# EAGLE board RSeries Lifter v16 (EAGLE 6.4)
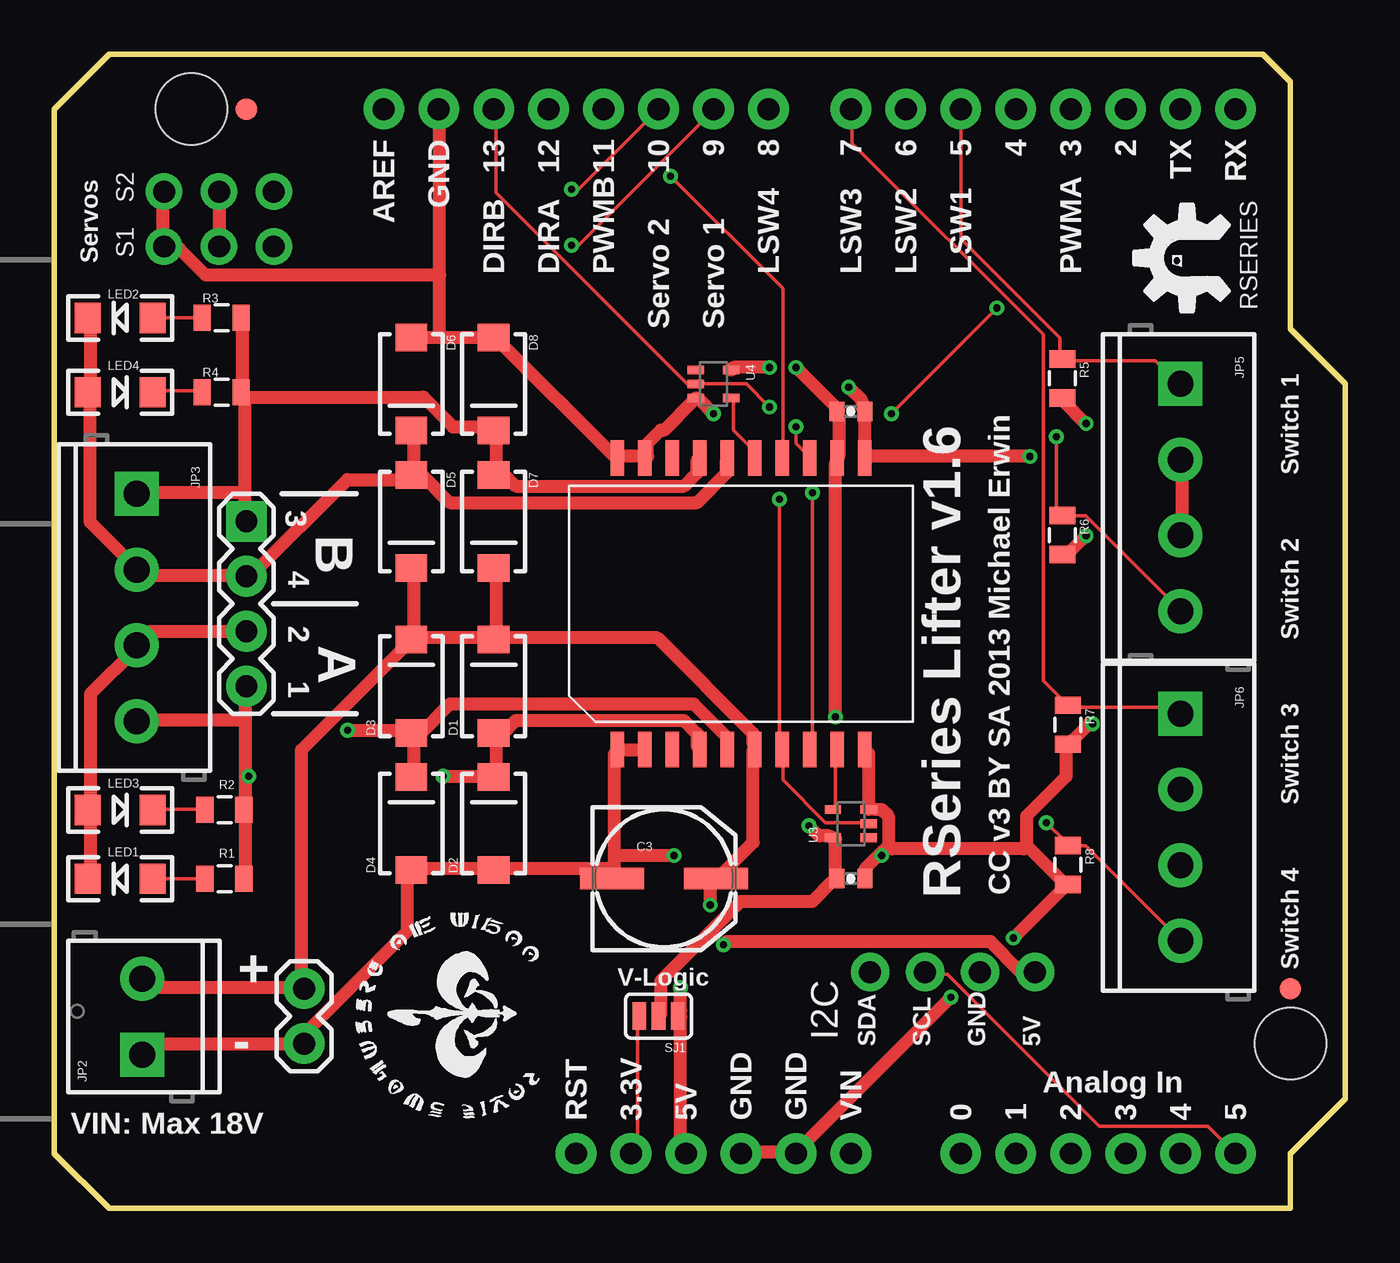
[diagram p0: board, top side]
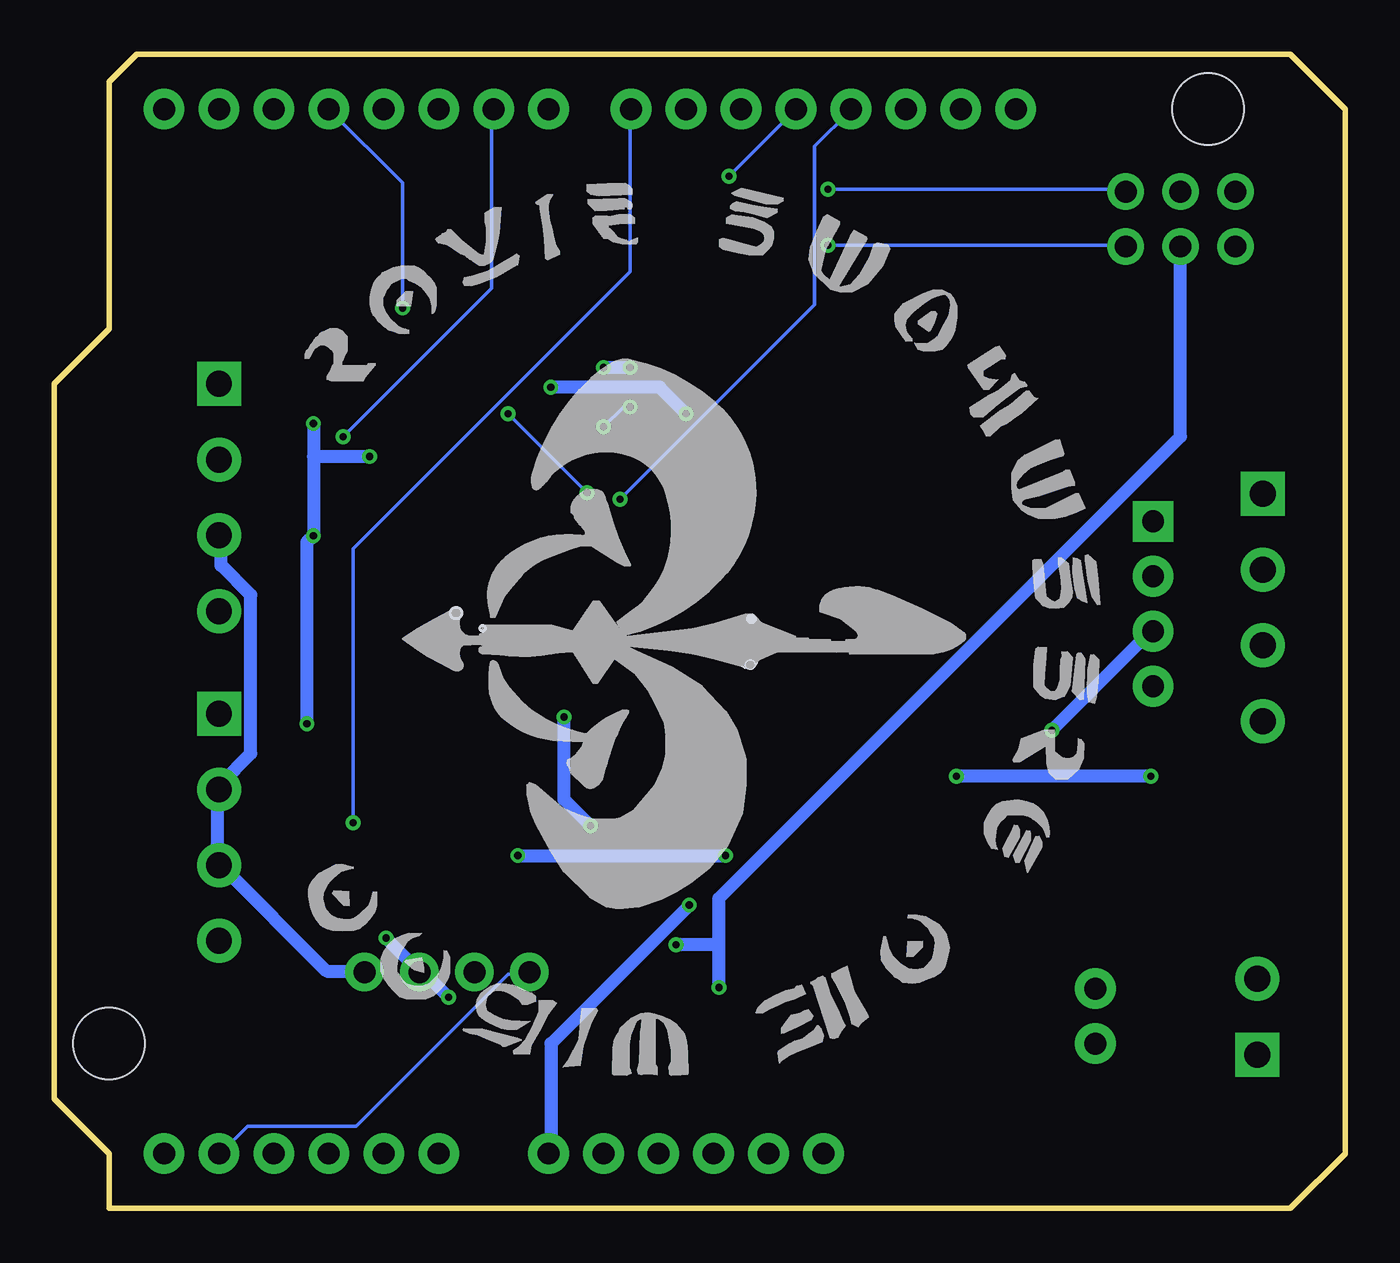
[diagram p1: board, bottom side, seen from below]

Size 59.69 x 53.34 mm. Coordinates in mm from the lower left corner, seen from the top.
Outline: 0,50.8 0,2.54 2.54,0 57.15,0 57.15,2.54 59.69,5.08 59.69,38.1 57.15,40.64 57.15,52.07 55.88,53.34 2.54,53.34 0,50.8
Copper layers (1*16): Top 0.0356mm / dielectric 1.5011mm / Bottom 0.0356mm
Design rules "LaenPCBOrder *": minimum track width 6mil, minimum drill 13mil, track to track 6mil, track to pad 6mil, pad to pad 6mil, via to via 6mil, smd to smd 6mil, copper to edge 15mil, drill to drill 6mil, minimum pad ring 7mil, minimum via ring 7mil, stop-mask expansion 4mil, vias tented up to drill 0mil, thermal gap 10mil
Net classes: 1 power: width 0.61 mm

## Footprints (pad centres in the part's own frame; a part is rotated, then mirrored left to right if it is on the bottom)
0402-CAP = smd 0.7 x 0.9: 1 -0.65,0; 2 0.65,0
NIPPON_F80 = smd 2.95 x 1: + 2.4,0; - -2.4,0
SMA-DIODE = smd 1.27 x 1.47: A -2.15,0; C 2.15,0
1X04-CLEANBIG = drill 1.016 pad 1.778: 1 -3.81,0; 2 -1.27,0; 3 1.27,0; 4 3.81,0
1X02 = drill 1.016 pad 1.88: 1 0,0; 2 2.54,0
SCREWTERMINAL-3.5MM-2 = drill 1.2 pad 2.032 square: 1 0,0 | drill 1.2 pad 2.032: 2 3.5,0
SCREWTERMINAL-3.5MM-4 = drill 1.2 pad 2.032 square: 1 0,0 | drill 1.2 pad 2.032: 2 3.5,0; 3 7,0; 4 10.5,0
1X04 = drill 1.016 pad 1.88 square: 1 0,0 | drill 1.016 pad 1.88: 2 2.54,0; 3 5.08,0; 4 7.62,0
1X03-CLEANBIG = drill 1.016 pad 1.676: 1 -2.54,0; 2 0,0; 3 2.54,0
LED-1206 = smd 1.2 x 1.4: A -1.5,0; C 1.5,0
0805 = smd 0.8 x 1.2: 1 -0.9,0; 2 0.9,0
SJ_3_PASTE1&2 = smd 0.635 x 1.27: 1 -0.889,0; 2 0,0; 3 0.889,0
DUEMILANOVE_SHIELD_NOLABELS = drill 1.016 pad 1.88: 3.3V 50.8,26.67; 5V 50.8,29.21; A0 50.8,41.91; A1 50.8,44.45; A2 50.8,46.99; A3 50.8,49.53; A4 50.8,52.07; A5 50.8,54.61; AREF 2.54,15.24; D2 2.54,49.53; D3 2.54,46.99; D4 2.54,44.45; D5 2.54,41.91; D6 2.54,39.37; D7 2.54,36.83; D8 2.54,33.02; D9 2.54,30.48; D10 2.54,27.94; D11 2.54,25.4; D12 2.54,22.86; D13 2.54,20.32; GND@0 50.8,31.75; GND@1 50.8,34.29; GND@2 2.54,17.78; RES 50.8,24.13; RX 2.54,54.61; TX 2.54,52.07; VIN 50.8,36.83 | hole 3.302: 45.72,57.15; 2.54,6.35
POWERSO20 = smd 1.651 x 0.635: P$1 -6.731,5.715; P$2 -6.731,4.445; P$3 -6.731,3.175; P$4 -6.731,1.905; P$5 -6.731,0.635; P$6 -6.731,-0.635; P$7 -6.731,-1.905; P$8 -6.731,-3.175; P$9 -6.731,-4.445; P$10 -6.731,-5.715; P$11 6.731,-5.715; P$12 6.731,-4.445; P$13 6.731,-3.175; P$14 6.731,-1.905; P$15 6.731,-0.635; P$16 6.731,0.635; P$17 6.731,1.905; P$18 6.731,3.175; P$19 6.731,4.445; P$20 6.731,5.715
SC70 = smd 0.4 x 0.75: 1 -0.65,-0.825; 2 0,-0.825; 3 0.65,-0.825; 4 0.65,0.825; 5 -0.65,0.825
FIDUCIAL-1X2 = smd 1 x 1: 1 0,0

## Placement (x,y rotation side)
C1  0.1uF  [0402-CAP]  36.83,15.24 0 top
C3  100uF,25V  [NIPPON_F80]  28.19,15.24 0 top
C8  0.1uF  [0402-CAP]  36.83,36.83 0 top
D1  MBRA140  [SMA-DIODE]  20.32,24.13 90 top
D2  MBRA140  [SMA-DIODE]  20.32,17.78 90 top
D3  MBRA140  [SMA-DIODE]  16.51,24.13 90 top
D4  MBRA140  [SMA-DIODE]  16.51,17.78 90 top
D5  MBRA140  [SMA-DIODE]  16.51,31.75 270 top
D6  MBRA140  [SMA-DIODE]  16.51,38.1 270 top
D7  MBRA140  [SMA-DIODE]  20.32,31.75 270 top
D8  MBRA140  [SMA-DIODE]  20.32,38.1 270 top
I2C  [1X04-CLEANBIG]  41.53,10.92 0 top
JP1  [1X02]  11.56,7.62 90 top
JP2  [SCREWTERMINAL-3.5MM-2]  4.06,7.11 90 top
JP3  [SCREWTERMINAL-3.5MM-4]  3.81,33.02 270 top
JP4  [1X04]  8.89,31.75 270 top
JP5  [SCREWTERMINAL-3.5MM-4]  52.07,38.1 270 top
JP6  [SCREWTERMINAL-3.5MM-4]  52.07,22.86 270 top
JP7  [1X03-CLEANBIG]  7.62,44.45 180 top
JP8  [1X03-CLEANBIG]  7.62,46.99 180 top
LED1  Yellow  [LED-1206]  3.05,15.24 180 top
LED2  Yellow  [LED-1206]  3.05,41.15 180 top
LED3  Blue  [LED-1206]  3.05,18.41 0 top
LED4  Blue  [LED-1206]  3.05,37.72 0 top
R1  1K  [0805]  7.87,15.24 0 top
R2  1K  [0805]  7.87,18.41 0 top
R3  1K  [0805]  7.75,41.15 0 top
R4  1K  [0805]  7.75,37.72 0 top
R5  10k  [0805]  46.61,38.35 270 top
R6  10k  [0805]  46.61,31.11 270 top
R7  10k  [0805]  46.86,22.35 270 top
R8  10k  [0805]  46.86,15.88 270 top
SJ1  [SJ_3_PASTE1&2]  27.94,8.89 180 top
U1  ARDUINO  [DUEMILANOVE_SHIELD_NOLABELS]  0,53.34 270 top
U2  L298  [POWERSO20]  31.75,27.94 90 top
U3  74HC1G04  [SC70]  36.83,17.78 90 top
U4  74HC1G04  [SC70]  30.48,38.1 270 top
U$3  FIDUCIAL1X2  [FIDUCIAL-1X2]  57.15,10.16 0 top
U$4  FIDUCIAL1X2  [FIDUCIAL-1X2]  8.89,50.8 0 top
U$6  [ROYAL-ENGINEERS-OF-NABOO-SMALL]  22.73,4.06 90 top
U$7  RSERIES-OSHW-LOGOMEDIUM  [RSERIES-OSHW-LOGO-MEDIUM]  52.32,43.81 90 top
U$10  [ROYAL-ENGINEERS-OF-NABOO-BOTTOM-LARGE]  45.59,26.16 270 bottom

## Library data of the parts
C1 C3 C8 D1-D8 JP1-JP6 LED1-LED4 R1-R4 SJ1 U1-U4 U$3 U$4 = SparkFun
I2C JP7 JP8 = adafruit
R5-R8 = SparkFun-Passives
U$6 U$7 U$10 = rseries

## Nets
3.3V: SJ1.3 U1.3.3V
5V [power]: I2C.4 JP5.2 JP5.3 JP6.2 JP6.3 JP7.2 JP8.2 SJ1.1 U1.5V
DIRA: U1.D12 U2.P$7 U3.2
DIRB: U1.D13 U2.P$13 U4.2
GND [power]: C1.2 C3.- C8.2 D2.A D4.A D6.A D8.A I2C.3 JP1.1 JP2.1 JP7.3 JP8.3 R5.2 R6.2 R7.2 R8.2 U1.GND@0 U1.GND@1 U1.GND@2 U2.P$1 U2.P$2 U2.P$10 U2.P$11 U2.P$19 U2.P$20 U3.3 U4.3
N$1: U2.P$9 U3.4
N$2: U2.P$15 U4.4
N$3: JP5.1 R5.1 U1.D5
N$4: LED1.A R1.1
N$5: LED3.C R2.1
N$6: JP6.1 R7.1 U1.D7
N$7: JP6.4 R8.1 U1.D8
N$8: LED2.A R3.1
N$9: LED4.C R4.1
N$10: JP7.1 U1.D9
N$11: JP8.1 U1.D10
N$12: JP5.4 R6.1 U1.D6
N$13: I2C.1 U1.A4
N$14: I2C.2 U1.A5
OUT1 [power]: D1.A D2.C JP3.4 JP4.4 R1.2 R2.2 U2.P$4
OUT2 [power]: D3.A D4.C JP3.3 JP4.3 LED1.C LED3.A U2.P$5
OUT3 [power]: D7.A D8.C JP3.1 JP4.1 R3.2 R4.2 U2.P$17
OUT4 [power]: D5.A D6.C JP3.2 JP4.2 LED2.C LED4.A U2.P$16
PWMA: U1.D3 U2.P$8
PWMB: U1.D11 U2.P$14
V-LOGIC [power]: C1.1 C8.1 SJ1.2 U2.P$12 U3.5 U4.5
VIN [power]: C3.+ D1.C D3.C D5.C D7.C JP1.2 JP2.2 U1.VIN U2.P$6

## Tracks (layer width: path | path; a pad name or v marks a point on that pad's centre or on a via)
3.3V
  Top 0.152: SJ1.3 26.98,8.84 26.98,2.9 26.67,2.59 U1.3.3V
5V  (via drill 0.33)
  Top 0.61: JP5.3 52.12,31.24 52.12,34.59 JP5.2 | JP8.2 JP7.2 | U1.5V 29.11,2.59 28.96,2.74 28.96,8.84 SJ1.1 28.96,9.14 v28.96,10.21 | v30.94,12.19 31.09,12.34 43.28,12.34 44.65,10.97 45.26,10.97 I2C.4
  Bottom 0.61: I2C.4 45.41,10.97 47.09,10.97 51.97,15.85 JP6.3 52.12,16.15 52.12,19.36 JP6.2 51.97,19.66 50.6,21.03 50.6,28.35 51.97,29.72 51.97,31.09 JP5.3 | JP7.2 7.62,35.66 28.96,14.33 28.96,12.19 | v28.96,10.21 28.96,12.19 | 28.96,12.19 v30.94,12.19
DIRA  (via drill 0.33)
  Top 0.152: U3.2 37.64,17.83 35.66,17.83 33.68,19.81 33.68,21.18 U2.P$7 33.53,21.34 v33.53,32.77
  Bottom 0.152: v33.53,32.77 24.54,41.76 24.54,49.07 22.86,50.75 U1.D12
DIRB  (via drill 0.33)
  Top 0.152: v33.07,37.03 32,38.1 U4.2 29.26,38.1 20.42,46.94 20.42,50.75 U1.D13 | v34.29,36.12 34.29,35.36 34.9,34.75 U2.P$13
  Bottom 0.152: v33.07,37.03 33.38,37.03 v34.29,36.12
GND  (via drill 0.33)
  Top 0.61: JP2.1 4.57,7.62 JP1.1 11.73,7.77 11.73,8.23 16.31,12.8 16.31,15.39 D4.A 16.61,15.7 20.27,15.7 D2.A 20.57,15.7 25.76,15.7 C3.- 25.91,15.24 25.91,16.31 | U2.P$2 27.28,21.18 26.06,21.18 U2.P$1 25.91,21.03 25.91,16.31 | U1.GND@0 31.85,2.59 34.29,2.59 U1.GND@1 34.44,2.74 v41.45,9.75 | U2.P$10 37.64,21.03 37.64,18.44 U3.3 37.95,18.44 38.25,18.44 38.56,18.14 38.56,16.76 | 38.56,16.76 38.18,16.38 | 38.18,16.38 37.49,15.7 C1.2 | v44.35,12.5 46.79,14.94 R8.2 46.63,15.09 44.96,16.76 | 44.96,16.76 44.96,18.14 46.79,19.96 46.79,21.34 R7.2 47.09,21.64 47.85,22.4 v48.01,22.4 | 38.56,16.76 38.71,16.61 44.81,16.61 44.96,16.76 | 37.49,34.75 37.49,36.73 C8.2 37.34,37.03 37.34,37.34 v36.73,37.95 | 37.49,34.75 U2.P$11 | v47.7,31.09 46.94,30.33 46.63,30.33 R6.2 | v47.7,36.27 46.63,37.34 R5.2 | v45.11,34.75 37.49,34.75 | JP8.3 5.03,46.94 5.03,44.5 JP7.3 5.33,44.35 5.79,44.35 7.01,43.13 17.83,43.13 | 17.83,40.23 20.27,40.23 D8.A 20.57,40.08 25.91,34.75 U2.P$20 26.06,34.75 27.13,34.75 U2.P$19 27.43,34.75 27.43,35.36 28.04,35.97 28.19,35.97 29.57,37.34 U4.3 29.87,37.34 v30.48,36.73 | 17.83,40.23 16.61,40.23 D6.A | 17.83,40.23 17.83,43.13 | 17.83,43.13 17.83,50.75 U1.GND@2 | v28.65,16.31 25.91,16.31 | v38.25,16.31 38.18,16.38
  Bottom 0.61: v44.35,12.5 42.82,10.97 I2C.3 42.52,10.82 v41.45,9.75 | v47.7,36.27 47.7,34.75 | 47.7,34.75 v47.7,31.09 48.01,30.79 v48.01,22.4 | 47.7,34.75 v45.11,34.75 | v36.73,37.95 31.7,37.95 v30.48,36.73 | v38.25,16.31 v28.65,16.31
N$1
  Top 0.152: U3.4 36.12,18.44 36.12,21.18 U2.P$9
N$2
  Top 0.152: U4.4 31.39,37.34 31.39,35.97 32.31,35.05 32.31,34.75 U2.P$15
N$3
  Top 0.152: JP5.1 51.97,38.1 50.9,39.17 46.63,39.17 R5.1 46.48,39.32 46.48,40.23 41.91,44.81 U1.D5
N$4
  Top 0.152: LED1.A R1.1
N$5
  Top 0.152: R2.1 6.86,18.44 4.57,18.44 LED3.C
N$6
  Top 0.152: JP6.1 51.97,22.86 51.66,23.16 46.94,23.16 R7.1 46.79,23.32 45.72,24.38 45.72,40.39 36.88,49.23 36.88,50.75 U1.D7
N$7  (via drill 0.33)
  Top 0.152: JP6.4 51.97,12.5 47.7,16.76 46.94,16.76 R8.1 46.79,16.92 v45.87,17.83
  Bottom 0.152: v45.87,17.83 45.87,30.48 33.07,43.28 33.07,50.75 U1.D8
N$8
  Top 0.152: LED2.A R3.1
N$9
  Top 0.152: R4.1 6.71,37.8 4.57,37.8 LED4.C
N$10  (via drill 0.33)
  Top 0.152: v23.93,44.5 24.23,44.5 30.48,50.75 U1.D9
  Bottom 0.152: v23.93,44.5 10.21,44.5 JP7.1
N$11  (via drill 0.33)
  Top 0.152: v23.93,47.09 24.23,47.09 U1.D10
  Bottom 0.152: v23.93,47.09 10.21,47.09 JP8.1
N$12  (via drill 0.33)
  Top 0.152: JP5.4 51.97,27.74 47.7,32 46.63,32 R6.1 46.48,32.16 46.33,32.31 v46.33,35.66
  Bottom 0.152: v46.33,35.66 39.47,42.52 39.47,50.75 U1.D6
N$13
  Bottom 0.152: I2C.1 37.8,10.82 38.71,10.82 45.72,3.81 50.75,3.81 51.97,2.59 U1.A4
N$14
  Top 0.152: U1.A5 53.34,3.81 48.31,3.81 41.3,10.82 40.39,10.82 I2C.2
OUT1  (via drill 0.33)
  Top 0.61: U2.P$4 29.72,21.34 29.72,21.95 29.11,22.55 21.34,22.55 20.73,21.95 D1.A 20.42,21.95 20.42,19.96 D2.C 20.12,19.96 v17.98,19.96 | R1.2 8.84,15.24 8.84,18.29 R2.2 8.84,18.59 8.84,19.96 | 8.84,22.55 8.84,24.08 JP4.4 | 8.84,22.55 8.84,19.96 | 8.84,22.55 3.81,22.55 JP3.4 | v8.99,19.96 8.84,19.96
  Bottom 0.61: v8.99,19.96 v17.98,19.96
OUT2  (via drill 0.33)
  Top 0.61: D4.C 16.61,19.96 16.61,21.95 D3.A | U2.P$5 31.09,21.34 31.09,21.79 29.57,23.32 18.29,23.32 16.92,21.95 D3.A | LED1.C 1.68,15.24 1.68,18.29 LED3.A 1.68,18.59 1.68,23.77 3.81,25.91 JP3.3 3.96,26.21 4.42,26.67 JP4.3 | v13.56,22.1 16.31,22.1 D3.A
  Bottom 0.61: v13.56,22.1 8.99,26.67 JP4.3
OUT3
  Top 0.61: U2.P$17 29.72,34.59 29.72,33.98 29.11,33.38 21.34,33.38 20.73,33.98 D7.A 20.42,33.98 20.42,35.81 D8.C 20.12,36.12 18.44,36.12 17.07,37.49 8.84,37.49 | R3.2 8.69,41.15 8.69,37.8 R4.2 8.84,37.49 | 8.84,33.07 8.84,31.85 JP4.1 | 8.84,33.07 8.84,37.49 | 8.84,33.07 3.81,33.07 JP3.1
OUT4
  Top 0.61: D5.A 16.61,33.98 16.61,35.81 D6.C | U2.P$16 31.09,34.59 31.09,33.98 29.72,32.61 18.29,32.61 16.92,33.98 D5.A | LED2.C 1.68,41.15 1.68,37.8 LED4.A 1.68,37.49 1.68,31.7 3.81,29.57 JP3.2 3.96,29.26 8.84,29.26 JP4.2 9.14,29.26 13.56,33.68 16.31,33.68 D5.A
PWMA  (via drill 0.33)
  Top 0.152: v35.05,33.07 35.05,21.34 U2.P$8 | v43.59,41.6 v38.71,36.73
  Bottom 0.152: v38.71,36.73 v35.05,33.07 | v43.59,41.6 43.59,47.4 U1.D3
PWMB  (via drill 0.33)
  Top 0.152: v28.5,47.7 33.68,42.52 33.68,34.75 U2.P$14
  Bottom 0.152: U1.D11 v28.5,47.7
V-LOGIC  (via drill 0.33)
  Top 0.61: v33.07,38.86 31.39,38.86 U4.5 | v34.29,38.86 36.27,36.88 C8.1 36.27,36.58 36.27,34.75 U2.P$12 36.12,34.44 v36.12,22.71 | SJ1.2 28.04,8.99 28.04,10.52 31.7,14.17 35.05,14.17 35.97,15.09 C1.1 36.12,15.24 36.12,17.07 U3.5 35.81,17.22 35.36,17.22 v34.9,17.68
  Bottom 0.61: v34.29,38.86 v33.07,38.86 | v36.12,22.71 36.12,18.9 v34.9,17.68
VIN  (via drill 0.33)
  Top 0.61: JP2.2 4.12,10.52 4.42,10.21 11.43,10.21 JP1.2 11.43,10.52 11.43,21.18 16.31,26.06 D3.C | D3.C 16.61,26.36 16.61,29.57 D5.C | D1.C 20.42,26.36 20.42,29.57 D7.C | D3.C 16.92,26.36 20.12,26.36 D1.C | v30.33,14.02 30.33,15.09 C3.+ 30.63,15.24 32.31,16.92 32.31,21.18 U2.P$6 32.31,21.49 32.31,21.95 27.89,26.36 20.73,26.36 D1.C
  Bottom 0.61: v30.33,14.02 36.73,7.62 36.73,2.59 U1.VIN

## Text on the board
tPlace: RSERIES
tValues: L298P013TR
_tsilk: AREF | GND | 13 | 12 | 11 | 10 | 9 | 8 | 7 | 6 | 5 | 4 | 3 | 2 | TX | RX | S2 | Servos | S1 | DIRB | DIRA | PWMB | LSW4 | LSW3 | LSW2 | LSW1 | PWMA | Servo 2 | Servo 1 | Switch 1 | 3 | B | 4 | 2 | A | Switch 2 | 1 | Switch 3 | RSeries Lifter v1.6 | CC v3 BY SA 2013 Michael Erwin | + | Switch 4 | V-Logic | - | SDA | SCL | GND | 5V | Analog In | RST | 3.3V | 5V | GND | GND | VIN | 0 | 1 | 2 | 3 | 4 | 5 | VIN: Max 18V